# EAGLE board x-OSC Gloves_v5 (EAGLE 6.4)
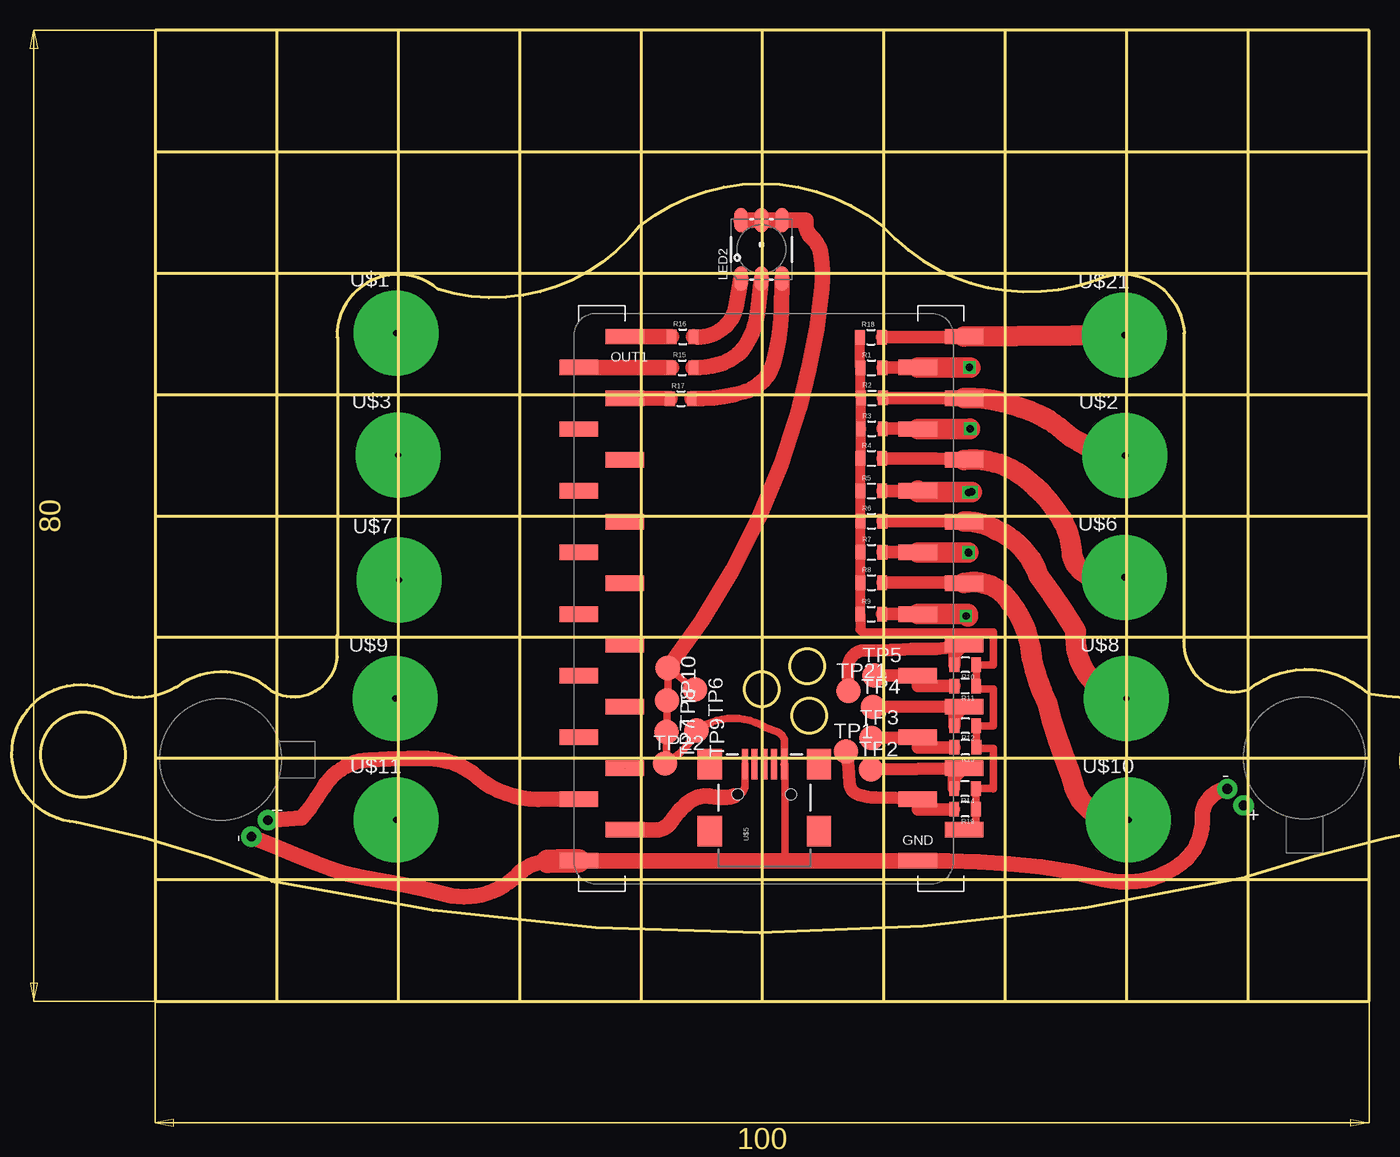
[diagram p0: board, top side]
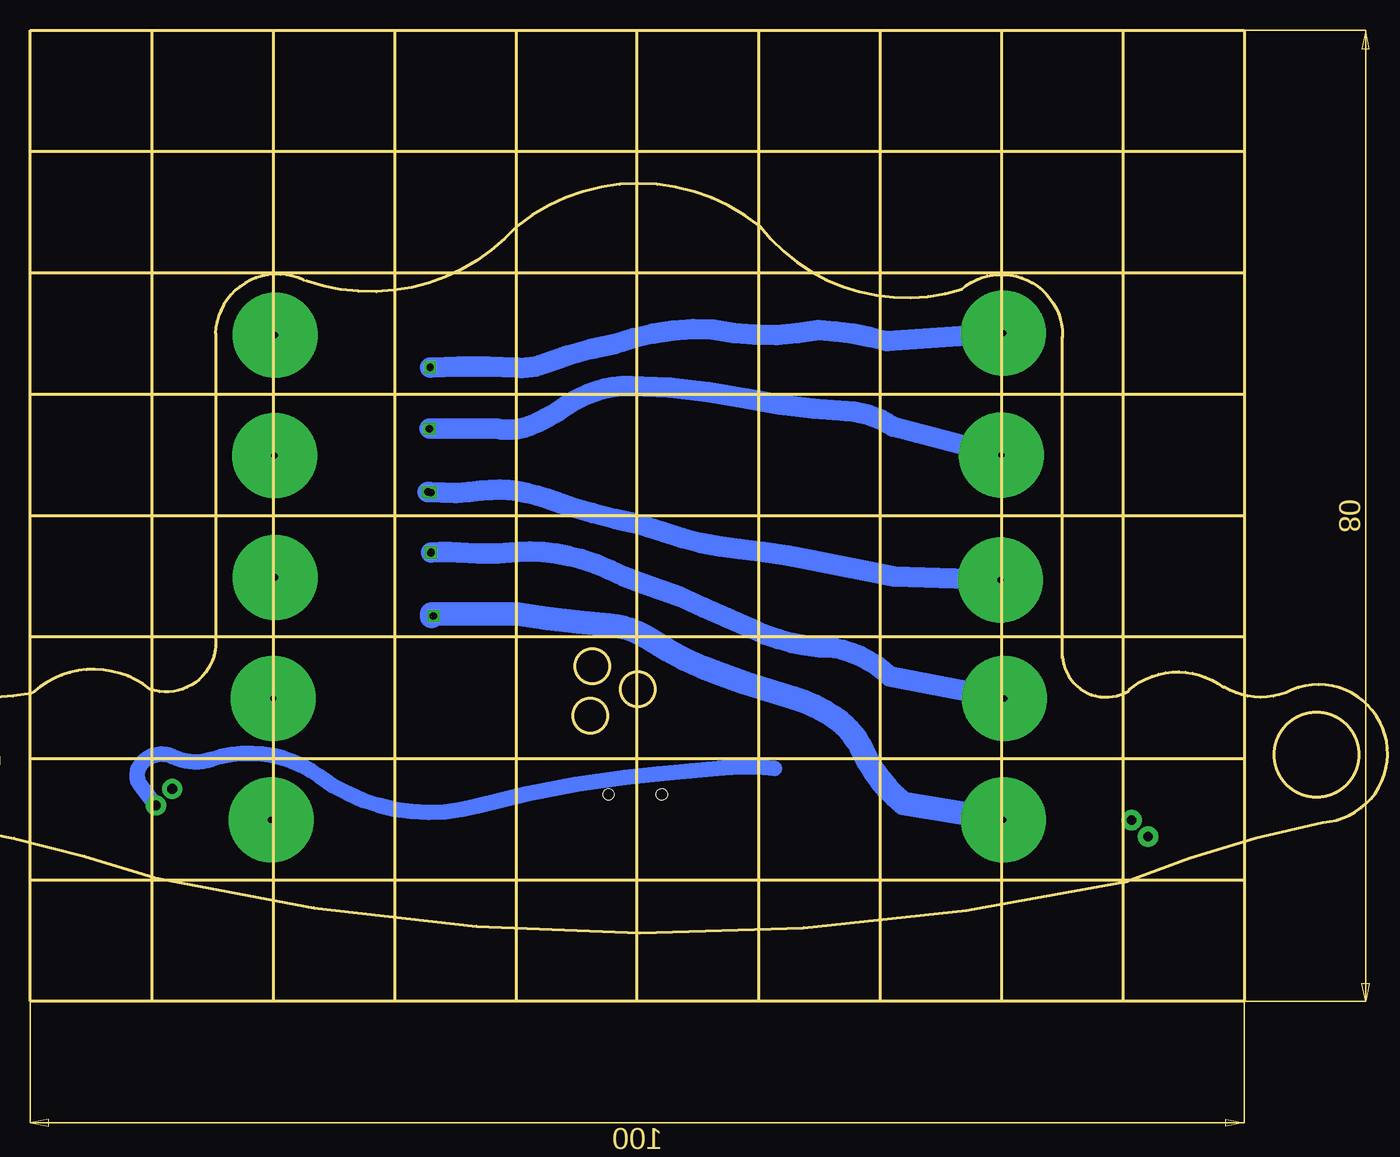
[diagram p1: board, bottom side, seen from below]

Size 100 x 80 mm. Coordinates in mm from the lower left corner, seen from the top.
Outline: 50,0 50,80
Outline: 40,80 40,0
Outline: 30,80 30,0
Outline: 20,80 20,0
Outline: 10,80 10,0
Outline: 0,70 0,80 60,80
Outline: 0,70 0,60
Outline: 0,60 0,50
Outline: 0,50 0,40
Outline: 0,40 0,30
Outline: 0,30 0,20
Outline: 0,20 0,10
Outline: 0,10 0,0 60,0
Outline: 60,0 70,0
Outline: 70,0 80,0
Outline: 80,0 90,0
Outline: 90,0 100,0 100,10
Outline: 100,10 100,20
Outline: 100,20 100,30
Outline: 100,30 100,40
Outline: 100,40 100,50
Outline: 100,50 100,60
Outline: 100,60 100,70
Outline: 100,70 100,80 90,80
Outline: 90,80 80,80
Outline: 80,80 70,80
Outline: 70,80 60,80
Outline: 60,80 60,0
Outline: 70,80 70,0
Outline: 80,80 80,0
Outline: 90,80 90,0
Outline: 100,10 0,10
Outline: 0,60 100,60
Outline: 0,50 100,50
Outline: 0,40 100,40
Outline: 0,30 100,30
Outline: 100,20 0,20
Outline: 0,70 100,70
Copper layers (1*16): Top 0.035mm / dielectric 1.5mm / Bottom 0.035mm
Design rules "default": minimum track width 10mil, minimum drill 24mil, track to track 8mil, track to pad 8mil, pad to pad 8mil, via to via 8mil, smd to smd 8mil, copper to edge 40mil, drill to drill 8mil, minimum pad ring 10mil, minimum via ring 8mil, stop-mask expansion 4mil, vias tented up to drill 0mil, thermal gap 10mil
Milling: area 52.5,22.1 to 55.3,25; area 48.6,24.3 to 51.4,27.1; area 52.3,26.2 to 55.1,29; area -9.5,16.8 to -2.5,23.8; area 102.6,16.3 to 109.6,23.3; 20 lines

## Footprints (pad centres in the part's own frame; a part is rotated, then mirrored left to right if it is on the bottom)
LED-TRICOLOR-5050 = smd 2 x 1.1: 1 -2.4,1.7; 2 -2.4,0; 3 -2.4,-1.7; 4 2.4,-1.7; 5 2.4,0; 6 2.4,1.7
0805 = smd 0.8 x 1.2: 1 -0.9,0; 2 0.9,0
TP20R = smd 2 x 2: TP 0,0
SNAP-PAD_7MM_RD = drill 0.5 pad 7: P$1 0,0
X-OSC_SMD = smd 3.17 x 1.27: GND 12.7,-21.59; GND@1 -15.24,-21.59; IN1 16.51,21.59; IN2 12.7,19.05; IN3 16.51,16.51; IN4 12.7,13.97; IN5 16.51,11.43; IN6 12.7,8.89; IN7 16.51,6.35; IN8 12.7,3.81; IN9 16.51,1.27; IN10 12.7,-1.27; IN11 16.51,-3.81; IN12 12.7,-6.35; IN13 16.51,-8.89; IN14 12.7,-11.43; IN15 16.51,-13.97; IN16 12.7,-16.51; OUT1 -11.43,21.59; OUT2 -15.24,19.05; OUT3 -11.43,16.51; OUT4 -15.24,13.97; OUT5 -11.43,11.43; OUT6 -15.24,8.89; OUT7 -11.43,6.35; OUT8 -15.24,3.81; OUT9 -11.43,1.27; OUT10 -15.24,-1.27; OUT11 -11.43,-3.81; OUT12 -15.24,-6.35; OUT13 -11.43,-8.89; OUT14 -15.24,-11.43; OUT15 -11.43,-13.97; OUT16 -15.24,-16.51; VBATT -11.43,-19.05; VOUT 16.51,-19.05
USB-MINIB = smd 2.5 x 0.5: D+ 2.5,0; D- 2.5,0.8; GND 2.5,-1.6; ID 2.5,-0.8; VBUS 2.5,1.6 | smd 2.5 x 2: MTN1 -3,4.5; MTN2 2.5,4.5; MTN3 -3,-4.5; MTN4 2.5,-4.5 | hole 0.9: 0,2.2; 0,-2.2
VIBE-MOTOR-10MM = drill 0.8 pad 1.676: + -5,-3.9; - -6.35,-2.54

## Placement (x,y rotation side)
LED2  LED-TRICOLOR-5050NO_IC  [LED-TRICOLOR-5050]  49.94,61.96 90 top
R1  [0805]  59.01,52.19 0 top
R2  [0805]  59.04,49.71 0 top
R3  [0805]  59.01,47.17 0 top
R4  [0805]  58.99,44.74 0 top
R5  [0805]  58.99,42.05 0 top
R6  [0805]  59.01,39.56 0 top
R7  [0805]  59.01,37 0 top
R8  [0805]  58.99,34.5 0 top
R9  [0805]  58.97,31.9 0 top
R10  [0805]  66.73,27.72 180 top
R11  [0805]  66.72,25.97 180 top
R12  [0805]  66.73,22.7 180 top
R13  [0805]  66.74,20.93 180 top
R14  [0805]  66.7,17.52 180 top
R15  [0805]  43.41,52.21 0 top
R16  [0805]  43.44,54.76 0 top
R17  [0805]  43.3,49.65 0 top
R18  [0805]  58.96,54.72 0 top
R19  [0805]  66.71,15.82 180 top
TP1  TPTP20R  [TP20R]  56.88,20.59 0 top
TP2  TPTP20R  [TP20R]  58.96,19.12 0 top
TP3  TPTP20R  [TP20R]  59.01,21.71 0 top
TP4  TPTP20R  [TP20R]  59.13,24.25 0 top
TP5  TPTP20R  [TP20R]  59.24,26.85 0 top
TP6  TPTP20R  [TP20R]  44.46,25.7 270 top
TP7  TPTP20R  [TP20R]  42.11,22.21 270 top
TP8  TPTP20R  [TP20R]  42.16,24.8 270 top
TP9  TPTP20R  [TP20R]  44.58,22.34 270 top
TP10  TPTP20R  [TP20R]  42.21,27.45 270 top
TP21  TPTP20R  [TP20R]  57.09,25.56 0 top
TP22  TPTP20R  [TP20R]  42,19.62 0 top
U$1  SNAP-PAD_7MM_ROUND  [SNAP-PAD_7MM_RD]  19.84,55.04 0 top
U$2  SNAP-PAD_7MM_ROUND  [SNAP-PAD_7MM_RD]  79.89,44.98 0 top
U$3  SNAP-PAD_7MM_ROUND  [SNAP-PAD_7MM_RD]  19.99,45.02 0 top
U$4  X-OSC  [X-OSC_SMD]  50.12,33.18 0 top
U$5  USB-MINIB-5PIN  [USB-MINIB]  50.17,17.03 90 top
U$6  SNAP-PAD_7MM_ROUND  [SNAP-PAD_7MM_RD]  79.83,34.94 0 top
U$7  SNAP-PAD_7MM_ROUND  [SNAP-PAD_7MM_RD]  20.08,34.7 0 top
U$8  SNAP-PAD_7MM_ROUND  [SNAP-PAD_7MM_RD]  80,24.96 0 top
U$9  SNAP-PAD_7MM_ROUND  [SNAP-PAD_7MM_RD]  19.74,24.95 0 top
U$10  SNAP-PAD_7MM_ROUND  [SNAP-PAD_7MM_RD]  80.18,14.96 0 top
U$11  SNAP-PAD_7MM_ROUND  [SNAP-PAD_7MM_RD]  19.85,14.95 0 top
U$12  MOTOR10MM  [VIBE-MOTOR-10MM]  5.37,19.92 90 top
U$17  MOTOR10MM  [VIBE-MOTOR-10MM]  94.66,20.04 0 top
U$21  SNAP-PAD_7MM_ROUND  [SNAP-PAD_7MM_RD]  79.84,54.9 0 top

## Library data of the parts
LED2 = SparkFun-LED
R1-R19 = SparkFun-Passives
TP1-TP10 TP21 TP22 = testpad
U$1-U$3 U$6-U$11 U$21 = hannahsEagleLib
U$4 = x-io
U$5 = SparkFun-Connectors
U$12 U$17 = SparkFun-Electromechanical

## Nets
GND: LED2.4 LED2.5 LED2.6 TP6.TP TP7.TP TP8.TP TP9.TP TP10.TP TP22.TP U$4.GND U$4.GND@1 U$5.GND U$12.- U$17.-
N$1: LED2.1 R16.2
N$2: LED2.2 R15.2
N$3: R15.1 U$4.OUT2
N$4: R1.2 U$1.P$1 U$4.IN2
N$5: R16.1 U$4.OUT1
N$6: R2.2 U$2.P$1 U$4.IN3
N$7: R3.2 U$3.P$1 U$4.IN4
N$8: R4.2 U$4.IN5 U$6.P$1
N$9: R5.2 U$4.IN6 U$7.P$1
N$12: R6.2 U$4.IN7 U$8.P$1
N$13: R7.2 U$4.IN8 U$9.P$1
N$14: R8.2 U$4.IN9 U$10.P$1
N$15: R9.2 U$4.IN10 U$11.P$1
N$16: R10.2 TP21.TP U$4.IN11
N$17: LED2.3 R17.2
N$18: R11.2 TP5.TP U$4.IN12
N$19: R12.2 TP4.TP U$4.IN13
N$20: R13.2 TP3.TP U$4.IN14
N$21: R14.2 TP2.TP U$4.IN15
N$22: R19.2 TP1.TP U$4.IN16
N$23: U$4.OUT15 U$17.+
N$24: U$4.OUT16 U$12.+
N$25: R17.1 U$4.OUT3
N$33: U$4.VBATT U$5.VBUS
N$40: R18.2 U$4.IN1 U$21.P$1
VDD: R1.1 R2.1 R3.1 R4.1 R5.1 R6.1 R7.1 R8.1 R9.1 R10.1 R11.1 R12.1 R13.1 R14.1 R18.1 R19.1 U$4.VOUT

## Tracks (layer width: path | path; a pad name or v marks a point on that pad's centre or on a via)
GND
  Top 0.61: 51.88,11.59 51.88,19.43 arc90 U$5.GND 51.84,19.53 51.84,21.31 arc66 51.28,22.18 arc5 50.25,22.57 arc67 TP9.TP arc-37 TP22.TP 42.11,19.62 TP7.TP 42.16,22.21 TP8.TP 42.22,24.8 TP10.TP TP6.TP
  Top 1.27: U$4.GND@1 51.88,11.59 U$4.GND arc-4 70.38,11.33 arc-11 78.1,10.06 arc53 84.56,11.4 arc54 86.25,15.06 arc-88 U$17.- | 32.31,11.53 arc42 29.84,10.43 arc-22 27.88,9.11 arc-38 23.91,8.82 arc6 18.44,9.95 arc-14 13.18,11.39 arc-1 U$12.- | LED2.4 LED2.5 LED2.6 53.59,64.36 53.59,64.02 arc47 54.03,63 arc-38 54.84,61.49 arc-15 54.93,58.81 arc-10 53.06,48.94 arc-22 TP10.TP
  Top 1.93: U$4.GND@1 arc3 32.31,11.53
N$1
  Top 1.27: LED2.1 47.84,57.24 arc-33 47.13,55.79 arc-55 R16.2
N$2
  Top 1.27: LED2.2 49.7,57.31 arc-19 48.96,54.6 arc-45 46.79,52.6 arc-22 R15.2
N$3
  Top 1.27: U$4.OUT2 R15.1
N$4  (1 unrouted)
  Top 1.016: R1.2 62.82,52.19 U$4.IN2
  Top 1.676: U$4.IN2 67.13,52.23
  Bottom 1.676: U$1.P$1 29.44,54.38 arc-12 35.07,55.31 arc23 43.76,55.36 arc-22 51.88,54.15 arc-11 57.63,52.54 arc25 R1.2 arc-7 67.07,52.23
N$5
  Top 1.27: U$4.OUT1 R16.1
N$6
  Top 1.016: R2.2 66.63,49.71 U$4.IN3
  Top 1.676: U$2.P$1 80.05,43.71 77.54,45.4 arc-16 74.8,46.97 arc20 72.73,48.35 arc7 70.52,49.18 arc20 U$4.IN3
N$7  (1 unrouted)
  Top 1.016: R3.2 62.82,47.17 U$4.IN4
  Top 1.676: U$4.IN4 67.08,47.15 67.13,47.19 | 67.13,47.19 | 67.13,47.19 67.09,47.16
  Bottom 1.676: U$3.P$1 28.92,47.35 arc-31 32.77,48.62 arc9 41,49.66 arc-11 50.56,50.7 arc-36 55.91,49.02 arc14 58.9,47.41 arc32 61.55,47.17 67.13,47.17 67.13,47.19
N$8
  Top 1.016: R4.2 64.28,44.74 U$4.IN5
  Top 1.676: U$6.P$1 76.94,35.07 arc-63 75.49,37.08 arc27 74.59,39.84 arc20 71.76,43.03 arc25 69.14,44.41 arc21 U$4.IN5
N$9  (via drill 0.6)
  Top 1.016: R5.2 62.82,42.05 U$4.IN6
  Top 1.676: v67.26,41.97 62.82,41.97 U$4.IN6
  Bottom 1.676: U$7.P$1 28.85,34.99 arc1 35.69,36.37 arc-6 41.56,37.27 arc14 47.85,38.65 arc-7 51.78,39.76 arc8 57.45,41.42 arc-12 R5.2 arc-17 U$4.IN6 arc13 67.12,41.97 arc-11 v67.26,41.97
N$10  (via drill 0.6)
  other vias: 67.06,52.23
N$12
  Top 1.016: R6.2 66.63,39.56 U$4.IN7
  Top 1.676: U$8.P$1 78.81,25.31 arc-74 75.85,30.5 arc5 72.75,35.09 arc48 69.34,38.81 arc33 U$4.IN7
N$13  (via drill 0.6)
  Top 1.016: R7.2 U$4.IN8
  Top 1.676: v66.98,36.99 U$4.IN8
  Bottom 1.676: U$9.P$1 29.2,26.76 arc-33 33.76,29.12 arc25 40.59,30.71 arc0 46.5,33.34 arc2 51.09,34.99 arc-12 54.62,36.44 arc-21 R7.2 arc9 64.7,36.99 arc-9 v66.98,36.99
N$14
  Top 1.016: R8.2 66.63,34.5 U$4.IN9
  Top 1.676: U$10.P$1 77.57,15.4 arc-48 75.62,17.92 arc5 74.83,20.29 arc-9 73.49,24.55 arc-20 72.08,29.2 arc27 70.5,32.77 arc72 U$4.IN9
N$15  (1 unrouted)
  Top 1.016: R9.2 62.82,31.9 U$4.IN10
  Top 1.676: U$4.IN10 66.94,31.91 66.94,31.71
  Bottom 1.93: U$11.P$1 28.05,16.31 arc28 31.39,20.57 arc-31 33.75,23.4 arc-18 37.15,25.01 arc3 43.08,26.91 arc15 48.89,29.8 arc-29 52.34,31 arc3 R9.2 66.94,31.9 66.94,31.71
N$16
  Top 1.016: U$4.IN11 | R10.2 65.83,28.57 U$4.IN11 | TP21.TP 57.06,27.4 arc-32 57.3,28.27 arc-60 58.46,28.91 arc5 61.66,29 arc-5 63.54,29.04 arc15 U$4.IN11
N$17
  Top 1.27: LED2.3 51.56,56.84 arc-14 50.92,52.6 arc-58 48.58,50.23 arc-18 R17.2
N$18
  Top 1.016: R11.2 62.82,25.97 U$4.IN12 TP5.TP
N$19
  Top 1.016: R12.2 65.83,23.48 U$4.IN13 TP4.TP
N$20
  Top 1.016: R13.2 62.82,20.93 U$4.IN14 TP3.TP
N$21
  Top 1.016: R14.2 65.8,18.38 U$4.IN15 TP2.TP
N$22
  Top 1.016: R19.2 62.82,15.82 U$4.IN16 62.82,16.72 59.34,16.8 arc-14 57.98,17 arc-74 57.18,18.04 arc13 TP1.TP
N$23  (1 unrouted)
  Bottom 1.27: U$17.+ 90.96,17.82 arc71 90.96,19.44 arc80 88.22,20.15 arc-44 85.09,19.95 arc55 76.19,18.53 arc-52 63.13,16.1 arc9 50.99,18.43 arc2 42.9,19.24 arc11 U$4.OUT15
N$24
  Top 1.27: U$12.+ 12.04,15.12 arc11 13.85,17.61 arc-57 17.67,19.9 arc-3 22.45,20 arc-40 26.56,18.47 arc41 31.52,16.65 U$4.OUT16
N$25
  Top 1.27: U$4.OUT3 R17.1
N$28  (via drill 0.6)
  other vias: 67.13,47.18
N$33
  Top 0.61: 47.68,16.91 arc90 48.57,17.8 U$5.VBUS
  Top 1.27: U$4.VBATT 38.71,14.11 41.22,14.11 arc56 42.42,14.74 arc-6 43.09,15.61 arc-14 44.12,16.54 arc-47 45.75,16.88 arc26 47.68,16.91
N$34  (via drill 0.6)
  other vias: 67,41.92
N$40
  Top 1.016: R18.2 66.63,54.72 U$4.IN1
  Top 1.676: U$4.IN1 U$21.P$1
N$41  (via drill 0.6)
  other vias: 67,36.94
N$43  (via drill 0.6)
  other vias: 66.79,31.75
VDD
  Top 0.61: 58.21,30.52 58.3,30.42 69.03,30.42 69.05,30.4 69.05,27.72 R10.1 R11.1 67.84,25.75 69.05,25.75 69.03,25.73 69.03,22.68 69.01,22.7 R12.1 67.64,22.69 R13.1 67.73,20.84 69.04,20.84 69.04,17.51 69.03,17.52 R14.1 R19.1 67.61,14.13 U$4.VOUT
  Top 0.813: R18.1 58.05,52.19 R1.1 58.1,49.71 R2.1 58.14,47.17 R3.1 58.11,44.74 R4.1 R5.1 58.09,39.56 R6.1 R7.1 R8.1 R9.1 58.07,30.65 58.21,30.52

## Text on the board
_tsilk: RGB | LED | Left | Right | vibration | vibration | motor | motor | x-OSC